# Altium PCB USB-C_SMD-TYPE-C-31-M-12_2025-02-03.pcbdoc
Units mm, origin at the board's own origin, x right, y up, seen from the top; angles counter-clockwise.
Board outline 38.7 x 34 mm, 2 copper layers (Top Layer, Bottom Layer); 1 components, 0 nets, 22 pads, 0 vias.
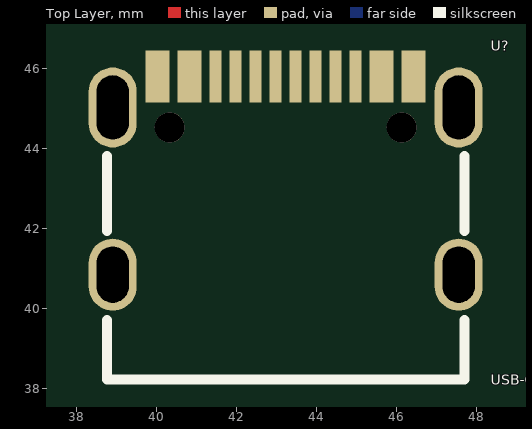
[diagram p0: Top Layer view]
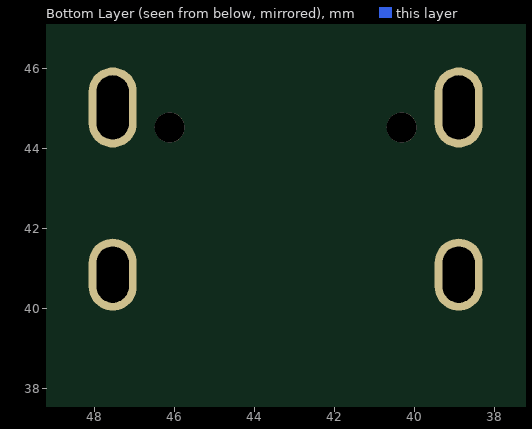
[diagram p1: Bottom Layer view, seen from below]

## Layer stack, top to bottom
Top Layer: signal copper (thickness not stored)
Dielectric: dielectric 0.32, FR-4, Dk 4.8
Bottom Layer: signal copper (thickness not stored)

## Board outline
64.098,25.4 25.4,25.4 25.4,59.399 64.098,59.399

## Components (designator, comment, footprint, x,y, rotation, side; value= is the part's Value field where it differs from the comment)
U? "USB-C_SMD-TYPE-C-31-M-12" USB-C_SMD-TYPE-C-31-M-12 43.225,42.273 r0 top

## Footprints (in the part's own frame and the unit in brackets; to place one, negate y for a bottom-side part, rotate by r counter-clockwise, add the part's x,y. Pads: shape width x height; smd on the part's side, far side on the other; paste and mask are expansions set on the pad)
USB-C_SMD-TYPE-C-31-M-12 [mm]
  oval 1.2x2 hole 0.8 slot 1.6 at 90 deg paste+0 mask+0.051: 0(-4.325,2.754) 1(4.325,2.754)
  oval 1.2x1.8 hole 0.8 slot 1.4 at 90 deg paste+0 mask+0.051: 2(4.325,-1.426) 3(-4.325,-1.426)
  rect 0.3x1.3 smd paste-100 mask+0.051: A1(-3.35,3.522) A4(-2.55,3.522) A5(-1.25,3.523) A6(-0.25,3.523) A7(0.25,3.523) A8(1.25,3.523) A9(2.55,3.523) A12(3.35,3.523) B1(3.05,3.523) B4(2.25,3.522) B5(1.75,3.523) B6(0.75,3.523) B7(-0.75,3.523) B8(-1.75,3.523) B9(-2.25,3.523) B12(-3.05,3.523)
  round 0.75 hole 0.75 unplated paste+0: ""(-2.9,2.254) ""(2.9,2.254)
  silkscreen extent -4.47,-4.05 4.47,1.54

## Nets (pads, with @x,y where several pads share a name; then routed paths per layer and width w, separated by ;. In a path a pad name is that pad's centre, name@x,y a point inside that pad or via, vN(x,y) a via of type N, cw(c..) or ccw(c..) an arc to the next point about the centre after c; other vN are vias at no path point)
pads on no net: U?. U?.0 U?.1 U?.2 U?.3 U?.A1 U?.A4 U?.A5 U?.A6 U?.A7 U?.A8 U?.A9 U?.A12 U?.B1 U?.B4 U?.B5 U?.B6 U?.B7 U?.B8 U?.B9 U?.B12